# EAGLE board sequenceGamePreliminary (EAGLE 9.6.2)
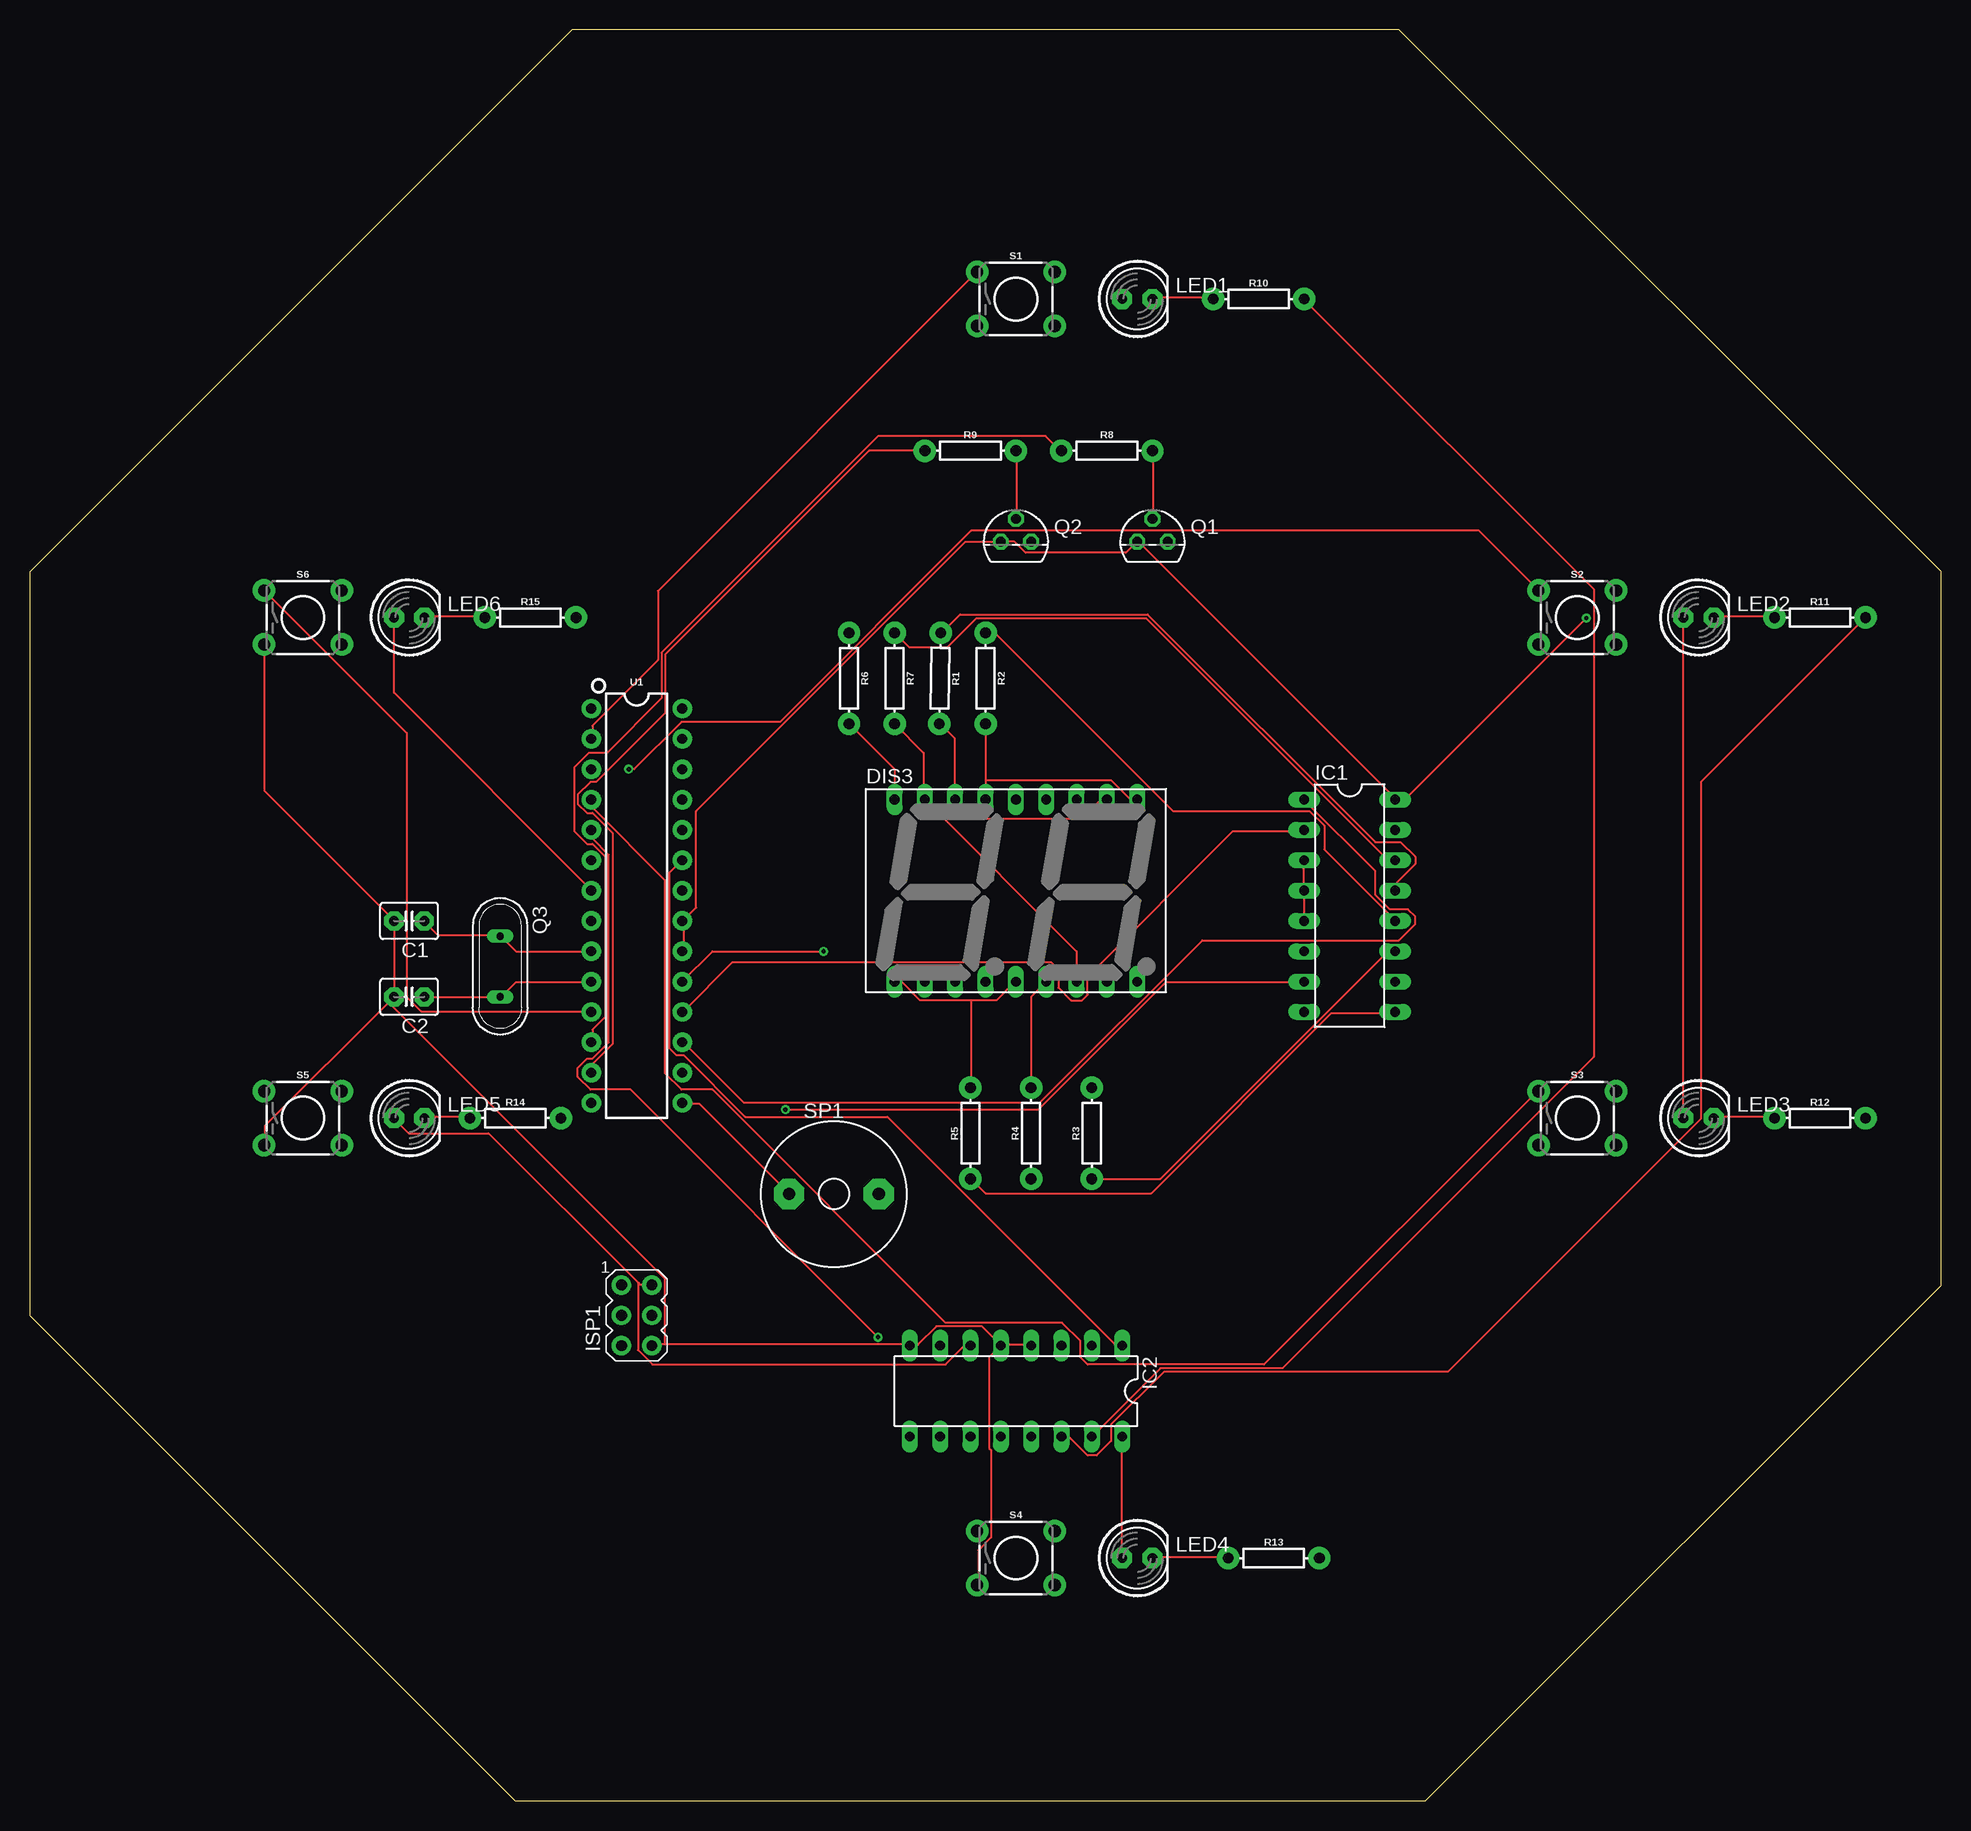
[diagram p0: board, top side]
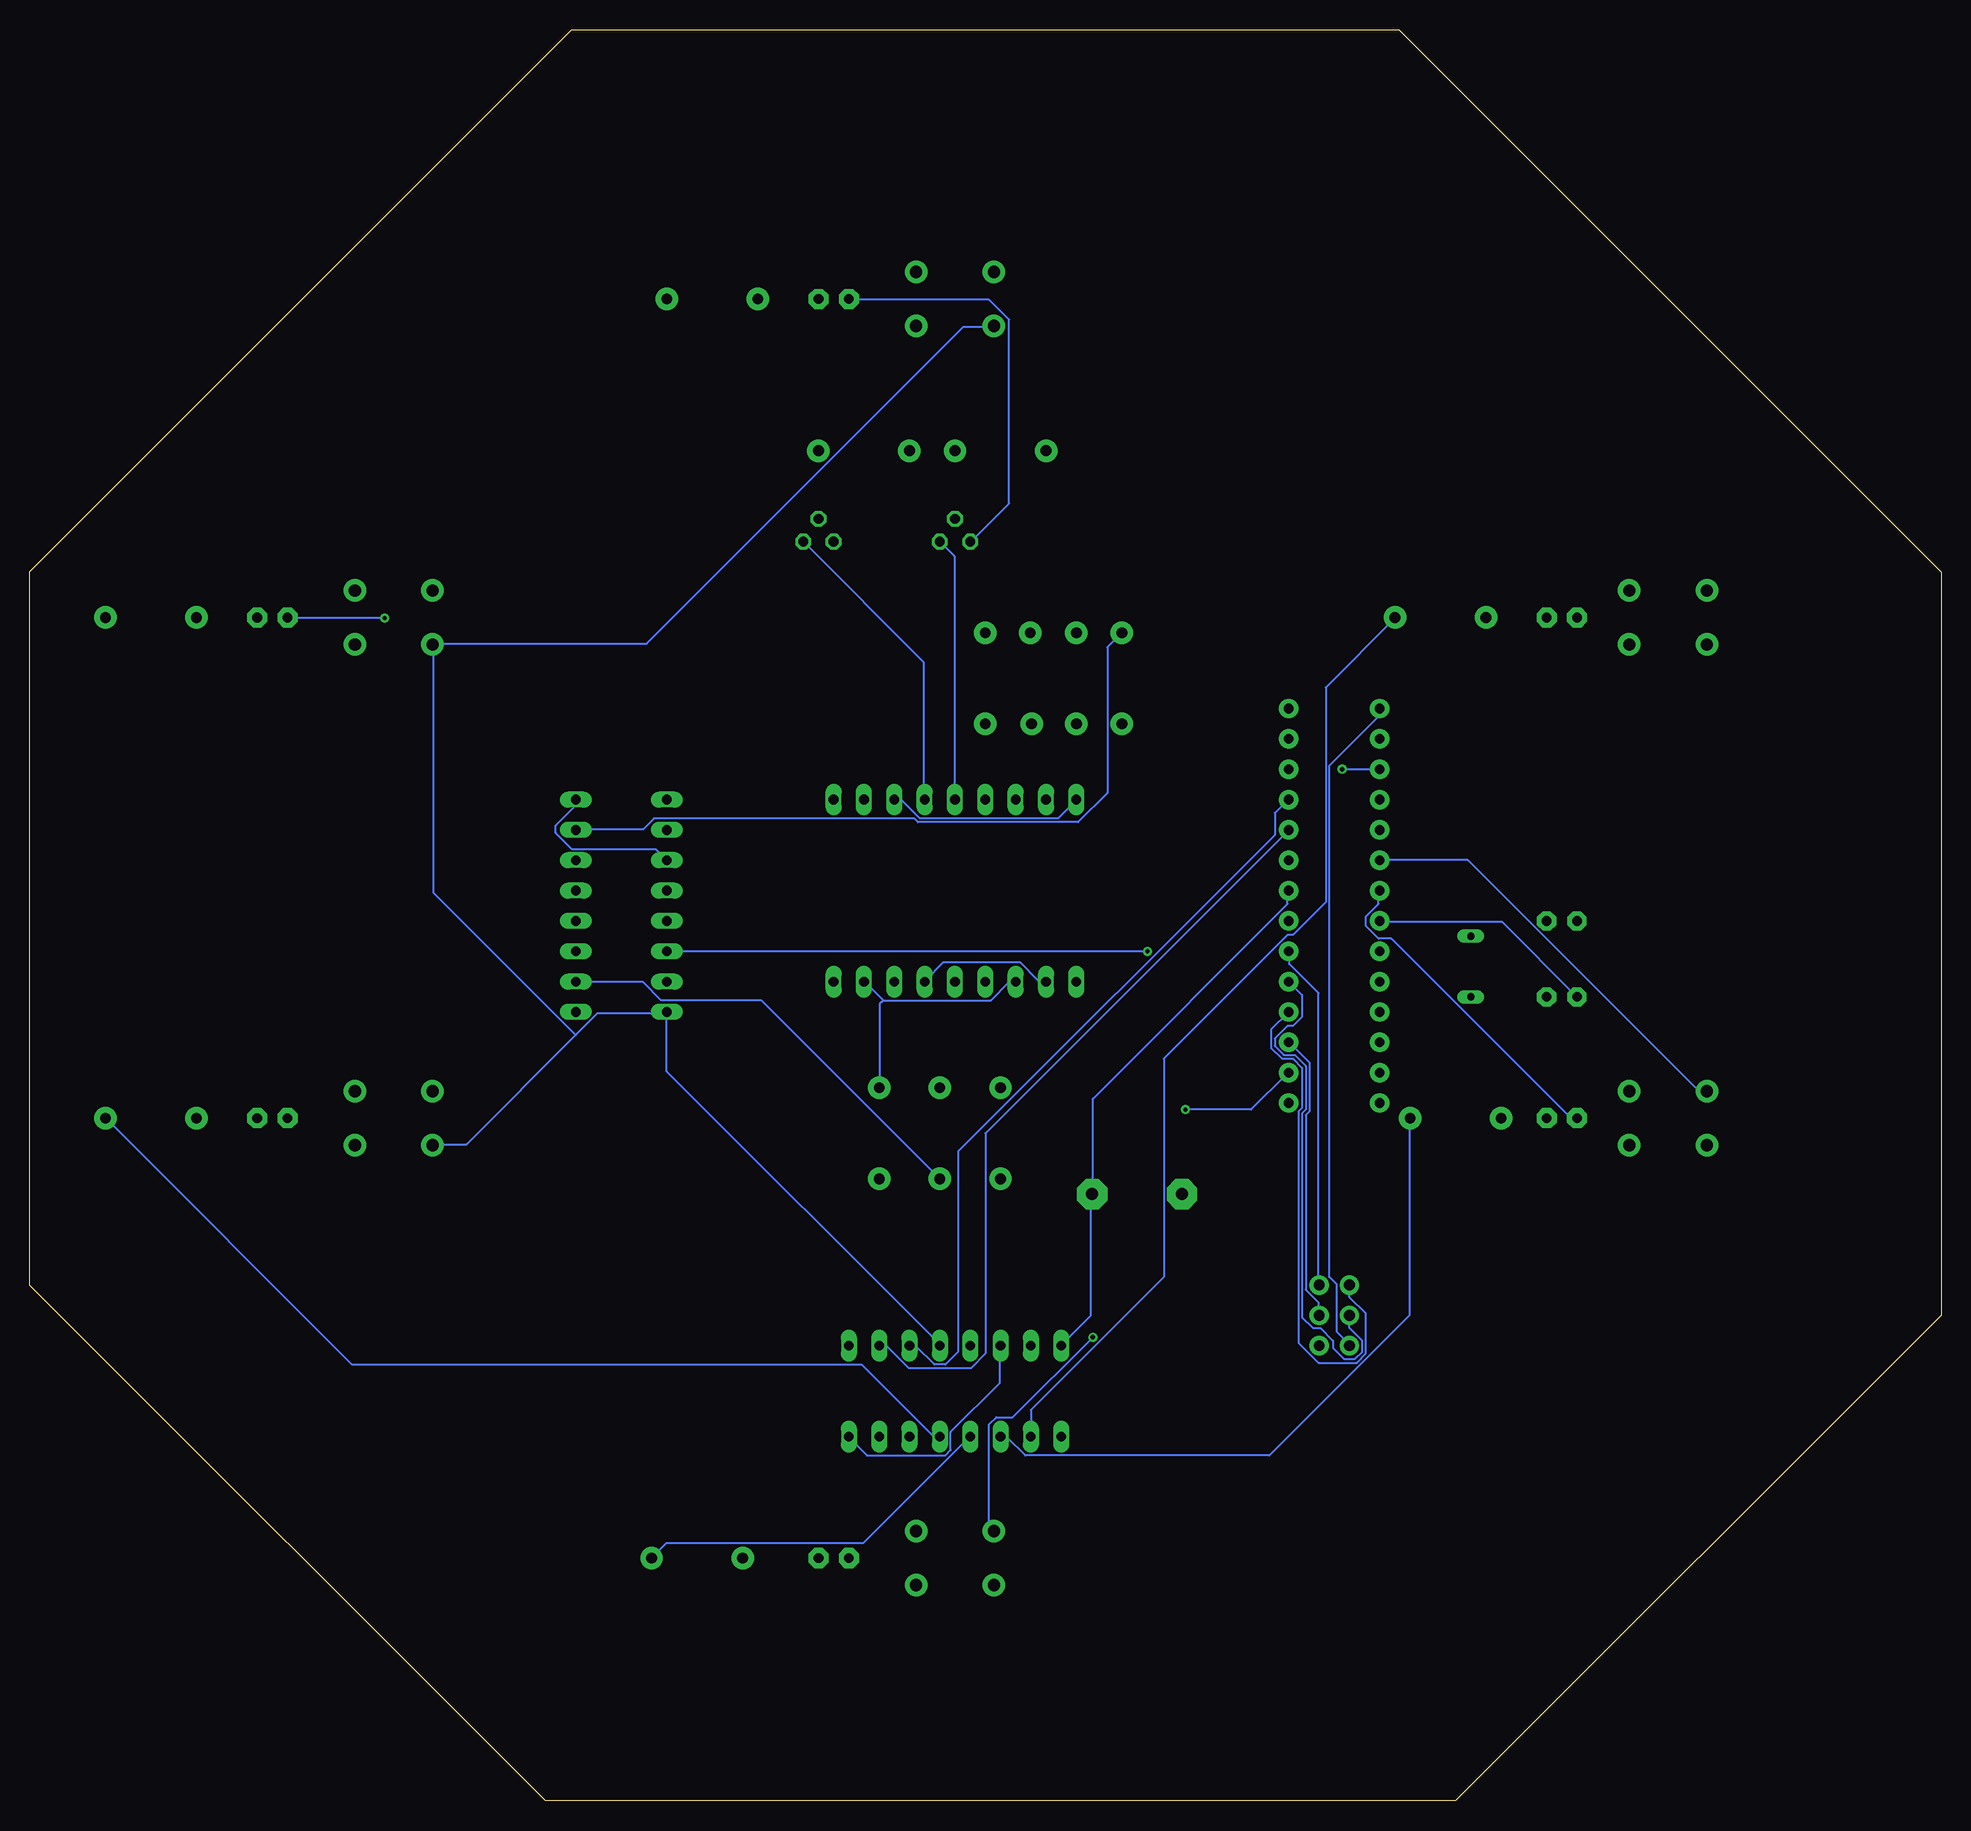
[diagram p1: board, bottom side, seen from below]

Size 160 x 148.26 mm. Coordinates in mm from the lower left corner, seen from the top.
Outline: 114.63,148.26 45.39,148.26 0,102.87 0,40.64 40.64,0 116.84,0 160,43.16 160,102.89 114.63,148.26
Copper layers (1*16): Top 0.035mm / dielectric 1.5mm / Bottom 0.035mm
Design rules "default": minimum track width 6mil, minimum drill 0.35mm, track to track 6mil, track to pad 6mil, pad to pad 6mil, via to via 6mil, smd to smd 6mil, copper to edge 40mil, drill to drill 6mil, minimum pad ring 10mil, minimum via ring 8mil, stop-mask expansion 4mil, vias tented up to drill 0mil, thermal gap 10mil

## Footprints (pad centres in the part's own frame; a part is rotated, then mirrored left to right if it is on the bottom)
C2.5-3 = drill 0.813 pad 1.6 octagon: 1 -1.27,0; 2 1.27,0
HDSP-R = drill 0.813 long: 1 -10.16,-7.62; 2 -7.62,-7.62; 3 -5.08,-7.62; 4 -2.54,-7.62; 5 0,-7.62; 6 2.54,-7.62; 7 5.08,-7.62; 8 7.62,-7.62; 9 10.16,-7.62; 10 10.16,7.62; 11 7.62,7.62; 12 5.08,7.62; 13 2.54,7.62; 14 0,7.62; 15 -2.54,7.62; 16 -5.08,7.62; 17 -7.62,7.62; 18 -10.16,7.62
DIL16 = drill 0.813 long: 1 -8.89,-3.81; 2 -6.35,-3.81; 3 -3.81,-3.81; 4 -1.27,-3.81; 5 1.27,-3.81; 6 3.81,-3.81; 7 6.35,-3.81; 8 8.89,-3.81; 9 8.89,3.81; 10 6.35,3.81; 11 3.81,3.81; 12 1.27,3.81; 13 -1.27,3.81; 14 -3.81,3.81; 15 -6.35,3.81; 16 -8.89,3.81
AVRISP = drill 0.9 pad 1.626: 1 -1.27,2.54; 2 1.27,2.54; 3 -1.27,0; 4 1.27,0; 5 -1.27,-2.54; 6 1.27,-2.54
LED5MM = drill 0.813 pad 1.676 octagon: A -1.27,0; K 1.27,0
TO92 = drill 0.813 octagon: 1 1.27,0; 2 0,1.905; 3 -1.27,0
QS = drill 0.61 long: 1 -2.54,0; 2 2.54,0
AXIAL-0.3 = drill 0.9 pad 1.88: P$1 -3.81,0; P$2 3.81,0
TACTILE_SWITCH_PTH_6.0MM = drill 1.016 pad 1.88: 1 -3.251,2.261; 2 3.251,2.261; 3 -3.251,-2.261; 4 3.251,-2.261
AL60P = drill 1.016 pad 2.54 octagon: 1 -3.759,0; 2 3.759,0
DIP28 = drill 0.813 pad 1.626: 1 -16.51,-3.81; 2 -13.97,-3.81; 3 -11.43,-3.81; 4 -8.89,-3.81; 5 -6.35,-3.81; 6 -3.81,-3.81; 7 -1.27,-3.81; 8 1.27,-3.81; 9 3.81,-3.81; 10 6.35,-3.81; 11 8.89,-3.81; 12 11.43,-3.81; 13 13.97,-3.81; 14 16.51,-3.81; 15 16.51,3.81; 16 13.97,3.81; 17 11.43,3.81; 18 8.89,3.81; 19 6.35,3.81; 20 3.81,3.81; 21 1.27,3.81; 22 -1.27,3.81; 23 -3.81,3.81; 24 -6.35,3.81; 25 -8.89,3.81; 26 -11.43,3.81; 27 -13.97,3.81; 28 -16.51,3.81

## Placement (x,y rotation side)
C1  20p  [C2.5-3]  31.75,73.66 180 top
C2  20p  [C2.5-3]  31.75,67.31 180 top
DIS3  HD-K121  [HDSP-R]  82.55,76.2 0 top
IC1  74LS47N  [DIL16]  110.49,74.93 270 top
IC2  74LS138N  [DIL16]  82.55,34.29 180 top
ISP1  AVRISP-6  [AVRISP]  50.8,40.64 0 top
LED1  [LED5MM]  92.71,125.73 0 top
LED2  [LED5MM]  139.7,99.06 0 top
LED3  [LED5MM]  139.7,57.15 0 top
LED4  [LED5MM]  92.71,20.32 0 top
LED5  [LED5MM]  31.75,57.15 0 top
LED6  [LED5MM]  31.75,99.06 0 top
Q1  2N3906  [TO92]  93.98,105.41 0 top
Q2  2N3906  [TO92]  82.55,105.41 0 top
Q3  [QS]  39.37,69.85 270 top
R1  [AXIAL-0.3]  76.2,93.98 269.1 top
R2  [AXIAL-0.3]  80.01,93.98 270 top
R3  [AXIAL-0.3]  88.9,55.88 90 top
R4  [AXIAL-0.3]  83.82,55.88 90 top
R5  [AXIAL-0.3]  78.74,55.88 90 top
R6  [AXIAL-0.3]  68.58,93.98 270 top
R7  [AXIAL-0.3]  72.39,93.98 270 top
R8  [AXIAL-0.3]  90.17,113.03 0 top
R9  [AXIAL-0.3]  78.74,113.03 0 top
R10  [AXIAL-0.3]  102.87,125.73 0 top
R11  [AXIAL-0.3]  149.86,99.06 0 top
R12  [AXIAL-0.3]  149.86,57.15 0 top
R13  [AXIAL-0.3]  104.14,20.32 0 top
R14  [AXIAL-0.3]  40.64,57.15 0 top
R15  [AXIAL-0.3]  41.91,99.06 0 top
S1  MOMENTARY-SWITCH-SPST-PTH-6.0MM  [TACTILE_SWITCH_PTH_6.0MM]  82.55,125.73 0 top
S2  MOMENTARY-SWITCH-SPST-PTH-6.0MM  [TACTILE_SWITCH_PTH_6.0MM]  129.54,99.06 0 top
S3  MOMENTARY-SWITCH-SPST-PTH-6.0MM  [TACTILE_SWITCH_PTH_6.0MM]  129.54,57.15 0 top
S4  MOMENTARY-SWITCH-SPST-PTH-6.0MM  [TACTILE_SWITCH_PTH_6.0MM]  82.55,20.32 0 top
S5  MOMENTARY-SWITCH-SPST-PTH-6.0MM  [TACTILE_SWITCH_PTH_6.0MM]  22.86,57.15 0 top
S6  MOMENTARY-SWITCH-SPST-PTH-6.0MM  [TACTILE_SWITCH_PTH_6.0MM]  22.86,99.06 0 top
SP1  SPEAKER/AL60P  [AL60P]  67.31,50.8 0 top
U1  328P  [DIP28]  50.8,74.93 270 top

## Library data of the parts
C1 C2 = capacitor-wima
DIS3 = display-hp; OC_FARNELL: unknown; OC_NEWARK: unknown
IC1 IC2 = 74xx-us
ISP1 LED1-LED6 SP1 = adafruit
Q1 Q2 = transistor-pnp
Q3 = special
R1 = SparkFun-Resistors; PROD_ID: 2k
R2-R15 = SparkFun-Resistors
S1-S6 = SparkFun-Switches; PROD_ID: SWCH-08441; SF_SKU: COM-00097
U1 = SparkFun-IC-Microcontroller; PROD_ID: IC-09136

## Nets
+5V: IC1.3 IC1.4 IC1.5 IC1.16 IC2.6 IC2.16 ISP1.2 LED1.A LED2.A LED3.A LED4.A LED5.A LED6.A Q1.3 Q2.3 U1.7 U1.20 U1.21
GND: C1.2 C2.2 IC1.8 IC2.4 IC2.5 IC2.8 ISP1.6 S1.3 S2.3 S3.3 S4.3 S5.3 S6.3 SP1.2 U1.8 U1.22
N$1: DIS3.10 DIS3.15 R2.P$2
N$2: SP1.1 U1.15
N$3: DIS3.3 DIS3.8 R3.P$2
N$4: DIS3.2 DIS3.6 R4.P$2
N$5: DIS3.1 DIS3.5 R5.P$2
N$6: DIS3.12 DIS3.18 R6.P$2
N$7: IC1.13 R1.P$1
N$8: IC1.12 R2.P$1
N$9: IC1.11 R3.P$1
N$10: IC1.10 R4.P$1
N$11: IC1.9 R5.P$1
N$12: Q2.2 R9.P$2
N$13: R8.P$1 U1.12
N$14: Q1.2 R8.P$2
N$15: DIS3.7 DIS3.17 R7.P$2
N$16: C2.1 Q3.2 U1.10
N$17: IC2.15 R10.P$2
N$18: IC2.14 R11.P$2
N$19: IC2.13 R12.P$2
N$20: IC2.12 R13.P$2
N$21: IC2.11 R14.P$2
N$22: IC2.10 R15.P$2
N$23: C1.1 Q3.1 U1.9
N$24: LED1.K R10.P$1
N$25: LED2.K R11.P$1
N$26: LED3.K R12.P$1
N$27: LED4.K R13.P$1
N$28: LED5.K R14.P$1
N$29: LED6.K R15.P$1
N$30: IC1.15 R6.P$1
N$31: S4.1 U1.5
N$32: S5.1 U1.6
N$33: IC1.6 ISP1.3 U1.19
N$34: ISP1.5 U1.1
N$35: S6.1 U1.11
N$36: S1.1 U1.2
N$37: IC1.2 ISP1.1 U1.18
N$38: S2.1 U1.3
N$39: IC2.1 U1.23
N$40: IC2.2 U1.24
N$41: S3.1 U1.4
N$42: IC1.7 U1.16
N$43: IC1.1 ISP1.4 U1.17
N$44: R9.P$1 U1.13
N$45: DIS3.13 Q1.1
N$46: IC2.3 U1.25
N$47: DIS3.14 Q2.1
N$48: DIS3.11 DIS3.16 R1.P$2
N$51: IC1.14 R7.P$1

## Tracks (layer width: path | path; a pad name or v marks a point on that pad's centre or on a via)
+5V  (via drill 0.35)
  Top 0.152: LED3.A 138.38,57.25 138.38,99.01 LED2.A | IC1.5 IC1.4 IC1.3 | 114.3,83.92 92.81,105.41 Q1.3 92.66,105.41 91.75,104.5 83.36,104.5 82.45,105.41 Q2.3 78.33,105.41 55.78,82.86 55.78,74.78 54.71,73.71 U1.21 54.71,73.56 54.71,71.12 U1.20 | v130.3,99.01 115.21,83.92 114.3,83.92 | 114.3,83.92 IC1.16 | LED4.A IC2.16 | 50.9,43.38 38.41,55.88 31.7,55.88 30.48,57.1 LED5.A | 50.9,43.38 51.05,43.23 51.97,43.23 ISP1.2 | LED6.A 30.48,92.76 46.94,76.3 U1.7 | 50.9,43.38 50.9,37.74 52.12,36.53 76.66,36.53 78.18,38.05 78.64,38.05 IC2.6
  Bottom 0.152: IC1.16 114.3,83.31 115.98,81.64 115.98,81.03 114.61,79.65 107.59,79.65 IC1.3 | LED1.A 91.44,125.68 79.7,125.68 78.03,124 78.03,108.61 81.23,105.41 Q2.3 | v130.3,99.01 138.38,99.01 LED2.A | IC2.6 78.79,38.05 78.79,35 82.91,30.89 82.91,29.36 83.36,28.91 89.92,28.91 91.44,30.43 IC2.16 | U1.7 47.09,76.15 47.09,75.08 48.16,74.02 48.16,73.25 47.09,72.19 46.02,72.19 31.09,57.25 30.48,57.25 LED5.A | U1.20 54.56,71.12 54.56,70.05 52.12,67.61 52.12,43.23 ISP1.2
GND
  Top 0.152: 30.02,66.85 19.66,56.49 19.66,54.97 S5.3 | S6.3 19.66,96.72 19.66,84.53 30.48,73.71 C1.2 C2.2 30.02,66.85 | IC2.5 81.23,38.2 79.7,39.73 75.89,39.73 74.37,38.2 73.76,38.2 IC2.8 73.61,38.2 53.19,38.2 | IC2.4 83.82,38.2 81.38,38.2 IC2.5 | 53.19,38.2 52.12,38.2 ISP1.6 | IC2.5 80.31,37.14 80.31,29.52 80.47,29.36 80.47,22.05 79.4,20.98 79.4,18.09 S4.3 | 30.02,66.85 53.19,43.69 53.19,38.2
  Bottom 0.152: 106.68,65.94 112.47,65.94 114.3,64.11 | 114.3,64.11 123.44,54.97 126.19,54.97 S3.3 | 114.3,64.11 126.19,76 126.19,96.72 S2.3 126.19,96.88 108.36,96.88 81.84,123.39 79.4,123.39 S1.3 | C2.2 36.73,73.56 46.94,73.56 U1.8 | U1.22 54.71,76.15 54.71,75.08 71.02,58.78 71.02,50.85 SP1.2 71.17,50.7 71.17,40.64 73.61,38.2 IC2.8 | 106.68,65.94 106.68,61.06 83.82,38.2 IC2.4 | 106.68,65.94 IC1.8
N$1
  Top 0.152: R2.P$2 80.01,85.45 | 80.01,85.45 DIS3.15 | 80.01,85.45 90.53,85.45 92.05,83.92 92.66,83.92 DIS3.10
N$2
  Top 0.152: U1.15 54.71,58.32 56.08,58.32 63.55,50.85 SP1.1
N$3
  Bottom 0.152: 88.54,67 79.55,67 78.03,68.53 77.57,68.53 DIS3.3 | 88.54,67 90.07,68.53 DIS3.8 | 88.54,67 88.85,66.7 88.85,59.69 R3.P$2
N$4
  Top 0.152: R4.P$2 83.82,67.31 DIS3.6
  Bottom 0.152: DIS3.2 74.98,68.68 75.59,68.68 77.11,70.21 83.52,70.21 85.04,68.68 DIS3.6
N$5
  Top 0.152: 78.79,67 80.92,67 82.45,68.53 DIS3.5 | 78.79,67 74.52,67 73,68.53 72.39,68.53 DIS3.1 | 78.79,67 78.79,59.69 R5.P$2
N$6
  Top 0.152: DIS3.18 72.39,86.36 R6.P$2
  Bottom 0.152: DIS3.12 87.63,83.77 87.02,83.77 85.5,82.25 73.91,82.25 72.39,83.77 DIS3.18
N$7
  Top 0.152: IC1.13 114.3,76.76 115.98,78.44 115.98,79.05 114.76,80.26 112.62,80.26 93.57,99.31 77.88,99.31 76.35,97.79 R1.P$1
N$8
  Top 0.152: R2.P$1 80.77,97.79 95.71,82.86 107.14,82.86 108.36,81.64 108.36,79.65 114.3,73.71 IC1.12
N$9
  Top 0.152: IC1.11 113.69,71.12 94.64,52.07 R3.P$1
N$10
  Bottom 0.152: R4.P$1 98.75,67 107.14,67 108.66,68.53 114.3,68.53 IC1.10
N$11
  Top 0.152: IC1.9 114.3,65.94 108.97,65.94 93.88,50.85 80.01,50.85 78.79,52.07 R5.P$1
N$12
  Top 0.152: Q2.2 82.6,107.39 82.6,113.03 R9.P$2
N$13
  Top 0.152: U1.12 47.09,63.5 47.09,64.57 48.16,65.63 48.16,79.05 47.09,80.11 46.63,80.11 45.57,81.18 45.57,86.51 46.79,87.73 48.31,87.73 52.88,92.3 52.88,96.11 71.02,114.25 85.04,114.25 86.26,113.03 R8.P$1
N$14
  Top 0.152: Q1.2 94.03,107.39 94.03,113.03 R8.P$2
N$15
  Top 0.152: R7.P$2 74.83,87.73 74.83,83.92 DIS3.17 87.63,71.12 DIS3.7
N$16
  Top 0.152: C2.1 Q3.2 39.47,67.31 40.69,68.53 46.94,68.53 U1.10
N$17
  Top 0.152: IC2.15 94.64,36.22 104.85,36.22 130.91,62.28 130.91,101.45 106.68,125.68 R10.P$2
N$18
  Top 0.152: R11.P$2 139.9,85.29 139.9,57.1 118.72,35.92 94.95,35.92 90.53,31.5 90.53,30.12 89.31,28.91 88.54,28.91 87.02,30.43 86.41,30.43 IC2.14
N$19
  Bottom 0.152: R12.P$2 133.05,36.53 90.37,36.53 84.43,30.58 83.82,30.58 IC2.13
N$20
  Bottom 0.152: R13.P$2 106.68,21.59 90.22,21.59 81.38,30.43 IC2.12
N$21
  Bottom 0.152: IC2.11 78.64,30.43 78.18,30.43 76.66,28.91 56.24,28.91 44.5,40.64 44.5,57.1 R14.P$2
N$22
  Bottom 0.152: IC2.10 76.2,32.72 65.08,43.84 65.08,62.13 54.71,72.49 54.25,72.49 51.51,75.23 51.51,93.22 45.72,99.01 R15.P$2
N$23
  Top 0.152: C1.1 33.07,73.56 34.14,72.49 39.32,72.49 Q3.1 39.47,72.34 40.69,71.12 U1.9
N$24
  Top 0.152: LED1.K 94.03,125.83 99.06,125.83 R10.P$1
N$25
  Top 0.152: LED2.K 140.97,99.16 146,99.16 R11.P$1
N$26
  Top 0.152: LED3.K 140.97,57.25 146,57.25 R12.P$1
N$27
  Top 0.152: LED4.K 94.03,20.37 100.28,20.37 R13.P$1
N$28
  Top 0.152: LED5.K 33.07,57.25 36.73,57.25 R14.P$1
N$29
  Top 0.152: LED6.K 33.07,99.16 38.1,99.16 R15.P$1
N$30
  Bottom 0.152: R6.P$1 69.8,96.57 69.8,84.38 72.24,81.94 85.65,81.94 85.95,82.25 107.75,82.25 108.66,81.33 114.3,81.33 IC1.15
N$31  (via drill 0.35)
  Top 0.152: v71.02,38.81 50.29,59.54 46.94,59.54 45.87,60.6 45.87,61.37 46.63,62.13 47.09,62.13 48.46,63.5 48.46,79.2 47.09,80.57 47.09,81.18 U1.5
  Bottom 0.152: v71.02,38.81 77.72,32.11 79.1,32.11 79.7,31.5 79.7,22.96 79.4,22.66 S4.1
N$32
  Bottom 0.152: U1.6 39.62,78.74 20.42,59.54 19.66,59.54 S5.1
N$33  (via drill 0.35)
  Top 0.152: v66.45,71.12 57.15,71.12 U1.19
  Bottom 0.152: v66.45,71.12 IC1.6 | ISP1.3 49.53,39.57 48.46,38.51 48.46,37.59 49.07,36.98 49.99,36.98 50.9,37.9 50.9,38.51 51.97,39.57 52.58,39.57 53.49,40.49 53.49,57.56 53.19,57.86 53.19,61.52 54.1,62.43 55.02,62.43 55.78,63.2 55.78,63.81 54.71,64.87 54.25,64.87 53.49,65.63 53.49,67.46 U1.19
N$34
  Bottom 0.152: U1.1 47.09,91.39 47.09,90.78 51.21,86.67 51.21,43.84 50.6,43.23 50.6,39.27 49.53,38.2 ISP1.5
N$35
  Top 0.152: U1.11 46.94,66.09 32.77,66.09 31.55,67.31 31.55,89.41 19.66,101.3 S6.1
N$36
  Top 0.152: U1.2 47.09,88.95 47.09,90.02 52.58,95.5 52.58,101.3 79.25,127.97 S1.1
N$37
  Top 0.152: IC1.2 106.68,81.18 100.74,81.18 88.54,68.99 88.54,67.46 88.09,67 87.17,67 86.11,68.07 86.11,69.6 85.5,70.21 58.83,70.21 54.71,66.09 U1.18
  Bottom 0.152: ISP1.1 49.53,42.16 48.16,40.79 48.16,37.44 48.92,36.68 52.12,36.68 53.8,38.35 53.8,57.71 53.49,58.01 53.49,61.37 54.25,62.13 55.17,62.13 56.08,63.04 56.08,64.57 U1.18
N$38  (via drill 0.35)
  Top 0.152: v50.14,86.36 50.6,86.36 54.56,90.32 62.79,90.32 78.79,106.32 121.31,106.32 126.19,101.45 S2.1
  Bottom 0.152: v50.14,86.36 U1.3
N$39
  Top 0.152: IC2.1 91.44,38.2 90.83,38.2 71.78,57.25 59.89,57.25 54.71,62.43 54.1,62.43 53.49,63.04 53.49,77.67 54.56,78.74 U1.23
N$40
  Bottom 0.152: U1.24 80.01,55.88 80.01,37.44 81.23,36.22 86.41,36.22 88.24,38.05 88.85,38.05 IC2.2
N$41
  Top 0.152: U1.4 47.09,83.77 47.09,83.16 53.19,77.06 53.19,60.91 54.56,59.54 57.15,59.54 76.66,40.03 86.41,40.03 87.94,38.51 87.94,37.14 88.54,36.53 103.33,36.53 126.19,59.39 S3.1
N$42  (via drill 0.35)
  Top 0.152: v63.25,57.86 84.43,57.86 95.1,68.53 106.68,68.53 IC1.7
  Bottom 0.152: v63.25,57.86 57.76,57.86 54.71,60.91 U1.16
N$43
  Top 0.152: IC1.1 106.68,83.77 112.62,77.83 112.62,75.84 113.84,74.62 115.37,74.62 115.98,74.02 115.98,73.41 114.61,72.03 98.15,72.03 84.58,58.47 59.74,58.47 54.71,63.5 U1.17
  Bottom 0.152: ISP1.4 52.12,40.64 52.12,41.71 53.19,42.77 53.19,57.4 52.88,57.71 52.88,61.82 54.56,63.5 U1.17
N$44
  Top 0.152: R9.P$1 70.26,113.03 53.19,95.96 53.19,91.08 47.4,85.29 46.94,85.29 45.87,84.23 45.87,83.46 46.63,82.7 47.09,82.7 48.77,81.03 48.77,63.35 47.09,61.67 47.09,61.06 U1.13
N$45
  Bottom 0.152: Q1.1 85.19,95.35 85.19,83.92 DIS3.13
N$46
  Bottom 0.152: IC2.3 86.26,38.05 85.8,38.05 84.28,36.53 83.36,36.53 82.3,37.59 82.3,54.36 55.78,80.87 55.78,82.7 54.71,83.77 U1.25
N$47
  Bottom 0.152: Q2.1 82.6,104.19 82.6,83.92 DIS3.14
N$48
  Top 0.152: R1.P$2 76.2,90.17 77.42,88.95 77.42,83.92 DIS3.16 77.57,83.77 79.1,82.25 88.09,82.25 89.61,83.77 90.07,83.77 DIS3.11
N$51
  Top 0.152: IC1.14 113.69,78.74 93.42,99.01 79.25,99.01 76.81,96.57 73.61,96.57 R7.P$1